# EAGLE board Iridium Carrier (2) (EAGLE 9.5.1)
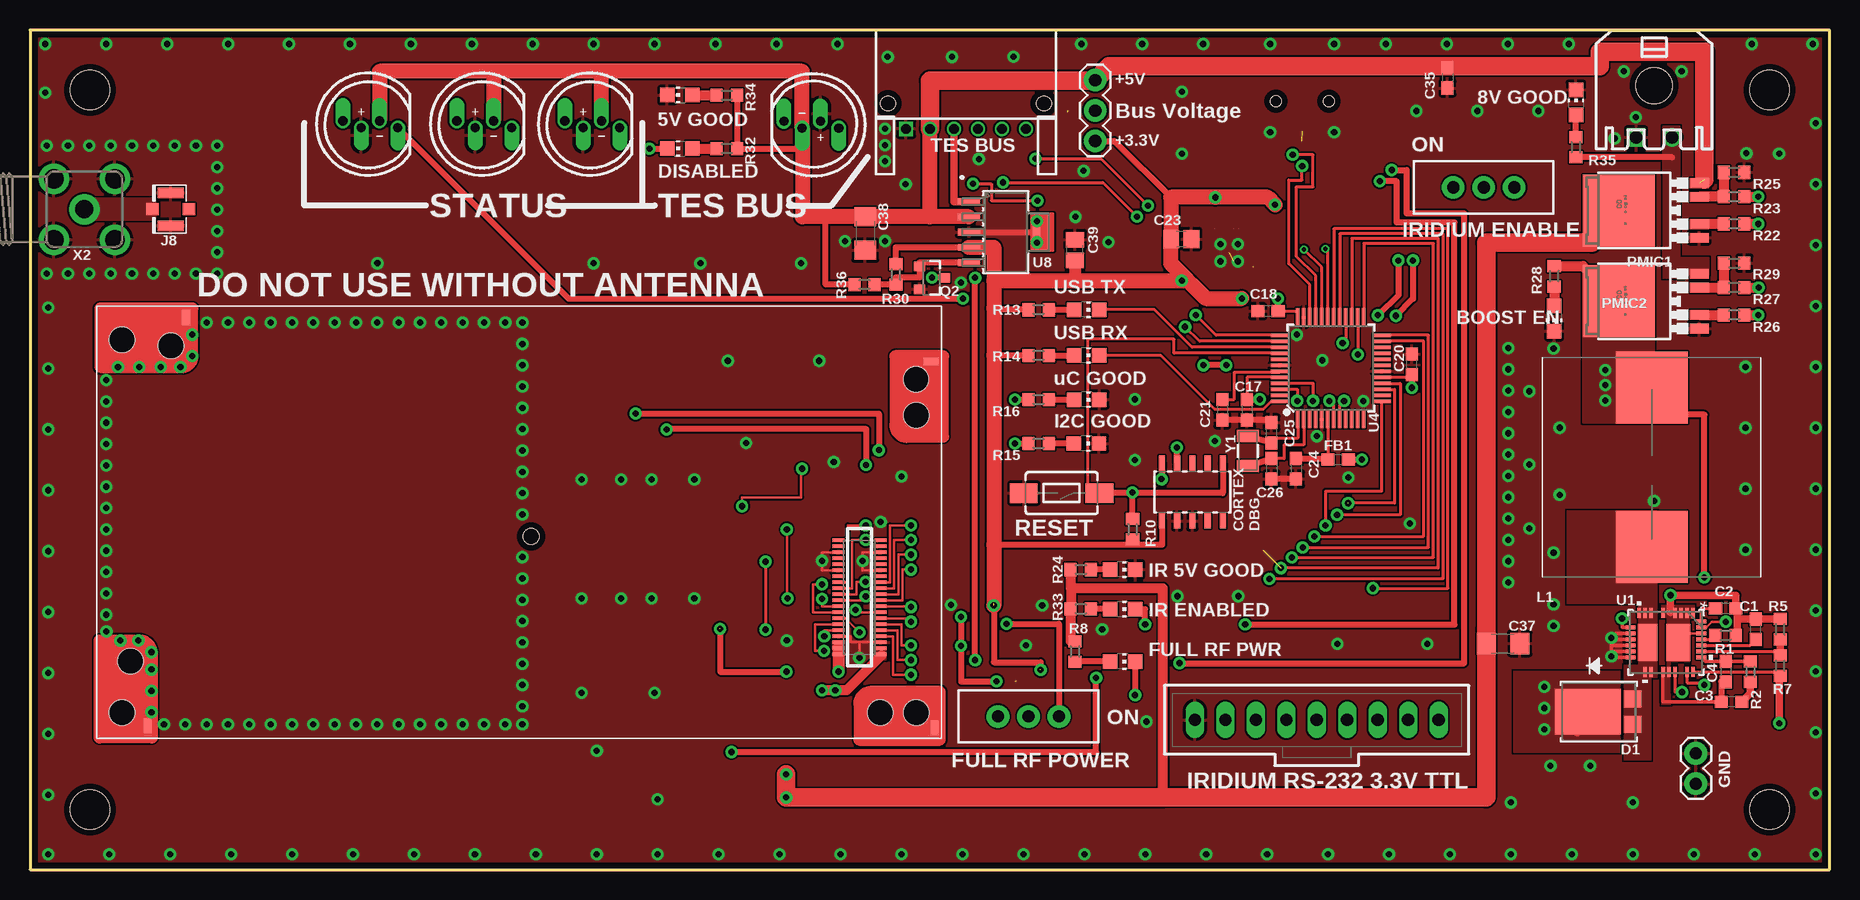
[diagram p0: board, top side]
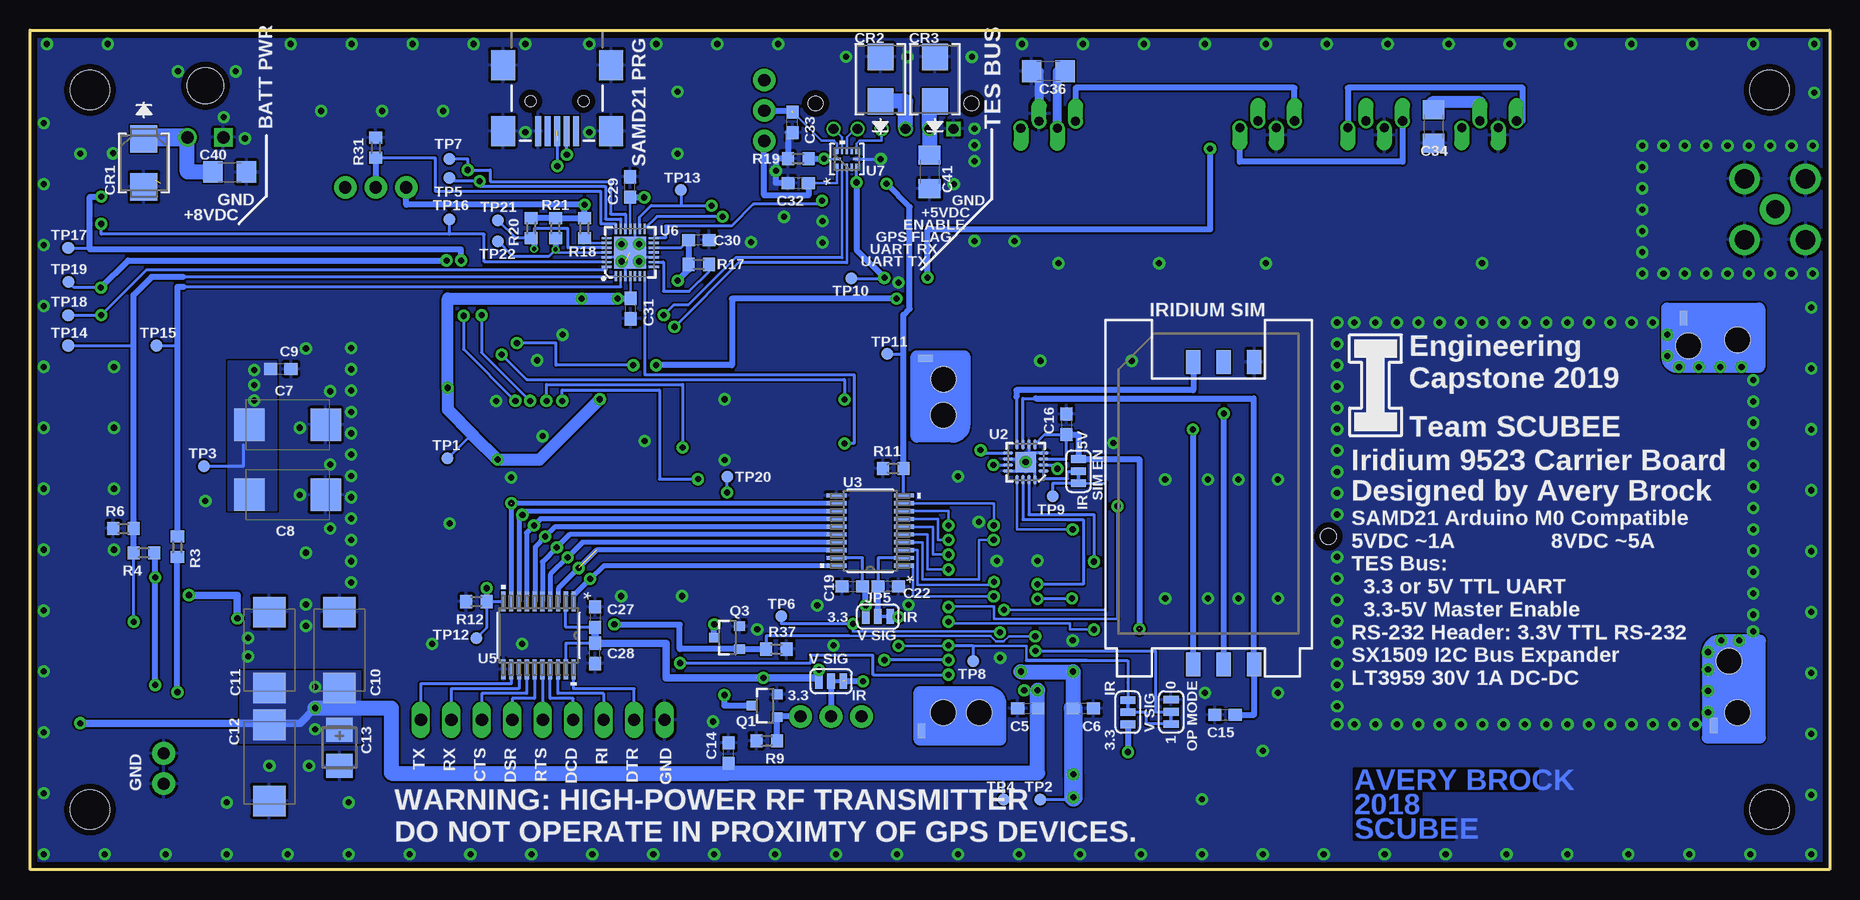
[diagram p1: board, bottom side, seen from below]

Size 150 x 70 mm. Coordinates in mm from the lower left corner, seen from the top.
Outline: 0,0 150,0 150,70 0,70 0,0
Copper layers (1*16): Top 0.035mm / dielectric 1.6mm / Bottom 0.035mm
Design rules "Elecrow_2-layer_PCB_eagle_rule": minimum track width 6mil, minimum drill 12mil, track to track 6mil, track to pad 6mil, pad to pad 6mil, via to via 8mil, smd to smd 0mil, copper to edge 20mil, drill to drill 10mil, minimum pad ring 6mil, minimum via ring 6mil, stop-mask expansion 0mil, vias tented up to drill 100mil, thermal gap 10mil
Net classes: 1 30V: clearance 0.254 mm to class 0

## Footprints (pad centres in the part's own frame; a part is rotated, then mirrored left to right if it is on the bottom)
C0603 = smd 1.1 x 1: 1 -0.85,0; 2 0.85,0
D/7343-31R = smd 2.55 x 2.7: + 3.175,0; - -3.175,0
CT3528 = smd 2 x 2.2: + -1.5,0; - 1.5,0
C0805 = smd 1.3 x 1.5: 1 -0.85,0; 2 0.85,0
C1206 = smd 1.6 x 1.8: 1 -1.4,0; 2 1.4,0
SMB = smd 2.311 x 2.261: 1 -1.994,0; 2 1.994,0
DIODE_DO214AA = smd 2.184 x 2.184: 1 -1.854,0; 2 1.854,0
DIODE_TO-277A = smd 1.397 x 1.473: 1 1.067,-2.794; 2 -1.067,-2.794 | smd 3.759 x 5.512: 3 0,0.927
0603 = smd 1.1 x 1: 1 -0.85,0; 2 0.85,0
IRIDIUM-9523 = smd 0.3 x 1: 1 -4.75,1.75; 2 -4.75,-1.75; 3 -4.25,1.75; 4 -4.25,-1.75; 5 -3.75,1.75; 6 -3.75,-1.75; 7 -3.25,1.75; 8 -3.25,-1.75; 9 -2.75,1.75; 10 -2.75,-1.75; 11 -2.25,1.75; 12 -2.25,-1.75; 13 -1.75,1.75; 14 -1.75,-1.75; 15 -1.25,1.75; 16 -1.25,-1.75; 17 -0.75,1.75; 18 -0.75,-1.75; 19 -0.25,1.75; 20 -0.25,-1.75; 21 0.25,1.75; 22 0.25,-1.75; 23 0.75,1.75; 24 0.75,-1.75; 25 1.25,1.75; 26 1.25,-1.75; 27 1.75,1.75; 28 1.75,-1.75; 29 2.25,1.75; 30 2.25,-1.75; 31 2.75,1.75; 32 2.75,-1.75; 33 3.25,1.75; 34 3.25,-1.75; 35 3.75,1.75; 36 3.75,-1.75; 37 4.25,1.75; 38 4.25,-1.75; 39 4.75,1.75; 40 4.75,-1.75 | smd 1.27 x 0.635: C$1 10.889,6.294; C$5 -23.317,-56.109; C$7 10.719,-59.284 | smd 1.27 x 0.635 bottom: C$2 11.123,6.551; C$6 -23.292,-56.972; C$8 10.693,-59.487 | smd 0.635 x 1.27 bottom: C$3 -19.936,6.22 | smd 0.635 x 1.27: C$4 -19.68,5.987 | hole 2.08: -18.18,4.73; -18.18,4.73 | hole 2.1: 9.62,1.73; -20.98,-57.37; 5.32,-60.77; -15.18,4.73; 9.62,4.73; -21.48,-61.47; 9.62,-61.47; 9.62,1.73; -20.98,-57.37; 5.32,-60.77; -15.18,4.73; 9.62,4.73; -21.48,-61.47 | hole 1.3: -5.08,-27.37
SIMHOLDER = smd 2 x 1.2: C1 -12.61,-3.81; C2 -12.61,-1.27; C3 -12.61,1.27; C5 12.61,-3.81; C6 12.61,-1.27; C7 12.61,1.27
1X03 = drill 1.016 pad 1.88: 1 0,0; 2 2.54,0; 3 5.08,0
SAMTECH_FTSH-105-01 = smd 0.508 x 1.27: 1 -2.54,-2.413; 2 -2.54,2.413; 3 -1.27,-2.413; 4 -1.27,2.413; 5 0,-2.413; 6 0,2.413; 7 1.27,-2.413; 8 1.27,2.413; 9 2.54,-2.413; 10 2.54,2.413
USB-MINIB = smd 2.5 x 0.5: D+ 2.5,0; D- 2.5,0.8; GND 2.5,-1.6; ID 2.5,-0.8; VBUS 2.5,1.6 | smd 2.5 x 2: S1 -3,4.5; S2 2.5,4.5; S3 -3,-4.5; S4 2.5,-4.5 | hole 0.9: 0,2.2; 0,-2.2
1X02 = drill 1.016 pad 1.88: 1 0,0; 2 2.54,0
1X6-JST-PA = drill 0.8 square: 1 0,0 | drill 0.8: 2 2,0; 3 4,0; 4 6,0; 5 8,0; 6 10,0 | hole 1.2: 11.5,2.1; -1.5,2.1
U.FL = smd 2.2 x 0.85: 1 0,1.375; 2 0,-1.375 | smd 1.05 x 1: FEED 1.525,0; NC -1.525,0
SMT-JUMPER_3_1-NC_TRACE_SILK = smd 0.635 x 1.27: 1 -1.016,0; 2 0,0; 3 1.016,0
WE-HCI_1890 = smd 6 x 6: 1 -6.65,0; 2 6.65,0
CHIP-LED0805 = smd 1.2 x 1.2: A 0,-1.05; C 0,1.05
WS2812B-PTH-KIT = drill 0.762 pad 1.27 offset: 1 2.413,0.079; 2 0.889,0.651; 3 -0.635,0.079; 4 -2.159,0.651
TO252-5-11 = smd 0.8 x 1.6: 1 -2.28,-5.41; 2 -1.14,-5.41; 4 1.14,-5.41; 5 2.28,-5.41 | smd 6 x 6: TAB 0,1.3
SOT23-3 = smd 0.8 x 0.9: 1 -0.95,-1; 2 0.95,-1; 3 0,1.1
R0603 = smd 1 x 1.1: 1 -0.85,0; 2 0.85,0
SWITCH_SPDT_PTH_11.6X4.0MM = drill 1.016 pad 1.88: 1 0,2.54; 2 0,0; 3 0,-2.54
TACTILE_SWITCH_SMD_6.0X3.5MM = smd 2.3 x 1.6: 1 -3.15,0; 2 3.15,0
PAD.03X.04 = smd 1.016 x 1.016: P$1 0,0
QFN-36_UHEMA = smd 0.813 x 0.305: 1 -2.451,2.25; 2 -2.451,1.75; 3 -2.451,1.25; 4 -2.451,0.75; 6 -2.451,-0.25; 8 -2.451,-1.25; 9 -2.451,-1.75; 10 -2.451,-2.25; 20 2.451,-1.75; 21 2.451,-1.25; 23 2.451,-0.25; 24 2.451,0.25; 25 2.451,0.75; 27 2.451,1.75; 28 2.451,2.25 | smd 0.305 x 0.813: 12 -1.25,-2.946; 13 -0.75,-2.946; 14 -0.25,-2.946; 15 0.25,-2.946; 16 0.75,-2.946; 17 1.25,-2.946; 30 1.25,2.946; 31 0.75,2.946; 32 0.25,2.946; 33 -0.25,2.946; 34 -0.75,2.946; 35 -1.25,2.946; 36 -1.75,2.946 | smd 3.099 x 1.981: 37 0,1.02 | smd 3.099 x 1.626: 38 0,-1.52
DAVID-HANDY_QFN16-3X3MM = smd 0.85 x 0.28: 1 -1.475,0.75; 2 -1.475,0.25; 3 -1.475,-0.25; 4 -1.475,-0.75; 9 1.475,-0.75; 10 1.475,-0.25; 11 1.475,0.25; 12 1.475,0.75 | smd 0.28 x 0.85: 5 -0.75,-1.475; 6 -0.25,-1.475; 7 0.25,-1.475; 8 0.75,-1.475; 13 0.75,1.475; 14 0.25,1.475; 15 -0.25,1.475; 16 -0.75,1.475 | smd 1.7 x 1.7: EXT 0,0
PW20 = smd 1.676 x 0.356: 1 -2.819,2.925; 2 -2.819,2.275; 3 -2.819,1.625; 4 -2.819,0.975; 5 -2.819,0.325; 6 -2.819,-0.325; 7 -2.819,-0.975; 8 -2.819,-1.625; 9 -2.819,-2.275; 10 -2.819,-2.925; 11 2.819,-2.925; 12 2.819,-2.275; 13 2.819,-1.625; 14 2.819,-0.975; 15 2.819,-0.325; 16 2.819,0.325; 17 2.819,0.975; 18 2.819,1.625; 19 2.819,2.275; 20 2.819,2.925
TQFP-48 = smd 1.5 x 0.28: 1 -4.25,2.75; 2 -4.25,2.25; 3 -4.25,1.75; 4 -4.25,1.25; 5 -4.25,0.75; 6 -4.25,0.25; 7 -4.25,-0.25; 8 -4.25,-0.75; 9 -4.25,-1.25; 10 -4.25,-1.75; 11 -4.25,-2.25; 12 -4.25,-2.75; 25 4.25,-2.75; 26 4.25,-2.25; 27 4.25,-1.75; 28 4.25,-1.25; 29 4.25,-0.75; 30 4.25,-0.25; 31 4.25,0.25; 32 4.25,0.75; 33 4.25,1.25; 34 4.25,1.75; 35 4.25,2.25; 36 4.25,2.75 | smd 0.28 x 1.5: 13 -2.75,-4.25; 14 -2.25,-4.25; 15 -1.75,-4.25; 16 -1.25,-4.25; 17 -0.75,-4.25; 18 -0.25,-4.25; 19 0.25,-4.25; 20 0.75,-4.25; 21 1.25,-4.25; 22 1.75,-4.25; 23 2.25,-4.25; 24 2.75,-4.25; 37 2.75,4.25; 38 2.25,4.25; 39 1.75,4.25; 40 1.25,4.25; 41 0.75,4.25; 42 0.25,4.25; 43 -0.25,4.25; 44 -0.75,4.25; 45 -1.25,4.25; 46 -1.75,4.25; 47 -2.25,4.25; 48 -2.75,4.25
QFN-28 = smd 0.85 x 0.2: 1 -1.975,1.2; 2 -1.975,0.8; 3 -1.975,0.4; 4 -1.975,0; 5 -1.975,-0.4; 6 -1.975,-0.8; 7 -1.975,-1.2; 15 1.975,-1.2; 16 1.975,-0.8; 17 1.975,-0.4; 18 1.975,0; 19 1.975,0.4; 20 1.975,0.8; 21 1.975,1.2 | smd 0.2 x 0.85: 8 -1.2,-1.975; 9 -0.8,-1.975; 10 -0.4,-1.975; 11 0,-1.975; 12 0.4,-1.975; 13 0.8,-1.975; 14 1.2,-1.975; 22 1.2,1.975; 23 0.8,1.975; 24 0.4,1.975; 25 0,1.975; 26 -0.4,1.975; 27 -0.8,1.975; 28 -1.2,1.975 | smd 2.65 x 2.65: 29 0,0
RUT12 = smd 0.6 x 0.2: 1 -0.7,0.8; 2 -0.7,0.4; 3 -0.7,0; 4 -0.7,-0.4; 5 -0.7,-0.8; 7 0.7,-0.8; 8 0.7,-0.4; 9 0.7,0; 10 0.7,0.4; 11 0.7,0.8 | smd 0.2 x 0.6: 6 0,-0.8; 12 0,0.8
SOT-223_5MC = smd 0.559 x 1.854: 1 -2.54,-3.058; 2 -1.27,-3.058; 3 0,-3.058; 4 1.27,-3.058; 5 2.54,-3.058 | smd 1.27 x 0.635: P$1 0,2.54
STAND-OFF = hole 3.302: 0,0
43650-0200 = drill 1.02 square: P$1 1.5,4.32 | drill 1.02: P$2 -1.5,4.32 | hole 3: 0,0
SMA90_DIP = drill 1.5 pad 2.54: ANTENNA 0,0 | drill 1.6 pad 2.54: GND1 -2.54,2.54; GND2 2.54,2.54; GND3 -2.54,-2.54; GND4 2.54,-2.54
70543-09 = drill 1.016 long: 1 -10.16,0; 2 -7.62,0; 3 -5.08,0; 4 -2.54,0; 5 0,0; 6 2.54,0; 7 5.08,0; 8 7.62,0; 9 10.16,0
CRYSTAL-SMD-3.2X1.5MM = smd 1 x 1.8: P$1 -1.25,0; P$2 1.25,0

## Placement (x,y rotation side)
C1  0.1uF  [C0603]  143.86,20.03 90 top
C2  10uF  [C0603]  141.34,21.75 180 top
C3  22nF  [C0603]  141.83,13.98 180 top
C4  50pF  [C0603]  141.34,16.5 270 top
C5  0.1uF  [C0603]  66.82,13.42 0 bottom
C6  0.1uF  [C0603]  62.2,13.42 180 bottom
C7  4.7uF 75V KO-CAP  [D/7343-31R]  128.52,37.08 180 bottom
C8  4.7uF 75V KO-CAP  [D/7343-31R]  128.52,31.24 180 bottom
C9  1uF  [C0603]  129.09,41.74 0 bottom
C10  4.7uF 75V KO-CAP  [D/7343-31R]  124.21,18.29 270 bottom
C11  4.7uF 75V KO-CAP  [D/7343-31R]  130.05,18.29 270 bottom
C12  4.7uF 75V KO-CAP  [D/7343-31R]  130.05,8.89 90 bottom
C13  2.2uF 50V KO-CAP  [CT3528]  124.21,10.16 270 bottom
C14  1uF  [C0603]  91.76,9.71 90 bottom
C15  1uF  [C0603]  50.39,12.92 0 bottom
C16  0.1uF  [C0603]  63.62,37.12 270 bottom
C17  0.1uF  [C0603]  101.44,38.34 270 top
C18  0.1uF  [C0603]  103.19,46.55 180 top
C19  0.1uF  [C0603]  81.45,23.61 0 bottom
C20  0.1uF  [C0603]  115.18,42.13 90 top
C21  0.1uF  [C0603]  99.38,38.34 270 top
C22  0.1uF  [C0603]  78.45,23.61 180 bottom
C23  1uF  [C0805]  95.96,52.58 0 top
C24  0.1uF  [C0603]  105.53,33.41 270 top
C25  15pF  [C0603]  103.5,36.41 90 top
C26  15pF  [C0603]  103.5,33.41 270 top
C27  0.1uF  [C0603]  102.91,21.04 270 bottom
C28  0.1uF  [C0603]  102.91,18.02 90 bottom
C29  0.1uF  [C0603]  99.97,56.91 90 bottom
C30  0.1uF  [C0603]  94.25,52.49 180 bottom
C31  0.1uF  [C0603]  99.94,46.77 90 bottom
C32  0.1uF  [C0603]  85.97,57.24 0 bottom
C33  0.1uF  [C0603]  86.45,62.29 90 bottom
C34  10uF  [C1206]  33.01,61.96 270 bottom
C35  0.1uF  [C0603]  118.16,66.01 270 top
C36  10uF  [C1206]  65.11,66.56 180 bottom
C37  4.7uF  [C1206]  122.78,18.85 0 top
C38  4.7uF  [C1206]  69.62,53.04 270 top
C39  1uF  [C0805]  87.11,51.66 90 top
C40  10uF  [C1206]  133.36,58.15 0 bottom
C41  10uF  [C1206]  75.02,58.17 270 bottom
CR1  SMBJ12A  [SMB]  140.51,58.91 270 bottom
CR2  SMBJ5.0A  [DIODE_DO214AA]  79.11,65.9 90 bottom
CR3  SMBJ5.0A  [DIODE_DO214AA]  74.57,65.9 90 bottom
D1  V10P10-MS/86A  [DIODE_TO-277A]  130.78,13.17 90 top
FB1  30Ω/1.8A  [0603]  109.04,34.18 0 top
J1  Molex 0541020404  [IRIDIUM-9523]  69.13,22.69 270 top
J2  SIM Holder  [SIMHOLDER]  51.76,29.7 90 bottom
J3  455-1750-1-ND  [1X03]  88.79,60.74 90 top
J4  CORTEX_DEBUG_SMD  [SAMTECH_FTSH-105-01]  96.89,31.48 0 top
J5  USB_MINI-B_SMT  [USB-MINIB]  106.06,64.07 270 bottom
J6  GND  [1X02]  138.86,7.15 90 top
J7  JST-PA-06-RT  [1X6-JST-PA]  73.02,61.76 0 top
J8  U.FL  [U.FL]  11.73,55.04 180 top
JP1  OP MODE  [SMT-JUMPER_3_1-NC_TRACE_SILK]  54.88,13.14 270 bottom
JP2  Sense V  [SMT-JUMPER_3_1-NC_TRACE_SILK]  58.49,13.12 90 bottom
JP3  Sense V  [SMT-JUMPER_3_1-NC_TRACE_SILK]  83.23,15.71 0 bottom
JP4  SIM_STOP  [SMT-JUMPER_3_1-NC_TRACE_SILK]  62.6,33.21 270 bottom
JP5  BUS_V  [SMT-JUMPER_3_1-NC_TRACE_SILK]  79.32,21.09 0 bottom
L1  47uH  [WE-HCI_1890]  135.17,33.54 270 top
LED1  RED  [CHIP-LED0805]  91.08,17.34 270 top
LED2  BLUE  [CHIP-LED0805]  88.06,35.52 270 top
LED3  BLUE  [CHIP-LED0805]  88.08,39.18 270 top
LED4  ORANGE  [CHIP-LED0805]  88.08,46.67 270 top
LED5  ORANGE  [CHIP-LED0805]  88.08,42.86 270 top
LED6  GREEN  [CHIP-LED0805]  91.08,25.01 270 top
LED7  WS2812B-PTH  [WS2812B-PTH-KIT]  28.5,62.5 180 top
LED8  WS2812B-PTH  [WS2812B-PTH-KIT]  38,62.5 180 top
LED9  WS2812B-PTH  [WS2812B-PTH-KIT]  47,62.5 180 top
LED10  WS2812B-PTH  [WS2812B-PTH-KIT]  65,61.74 0 top
LED11  GREEN  [CHIP-LED0805]  127.04,45.94 180 top
LED12  RED  [CHIP-LED0805]  54.17,60.11 90 top
LED13  GREEN  [CHIP-LED0805]  91.08,21.7 270 top
LED14  GREEN  [CHIP-LED0805]  54.17,64.58 90 top
LED15  GREEN  [CHIP-LED0805]  128.87,63.96 0 top
PMIC1  BTS50060  [TO252-5-11]  133.72,54.95 90 top
PMIC2  BTS50060  [TO252-5-11]  133.72,47.38 90 top
Q1  2N7002  [SOT23-3]  88.72,13.65 90 bottom
Q2  2N7002  [SOT23-3]  75.15,49.34 270 top
Q3  2N7002  [SOT23-3]  91.87,19.34 90 bottom
R1  10k  [R0603]  141.34,19.52 180 top
R2  3.3k  [R0603]  143.4,16.5 90 top
R3  20k  [R0603]  137.71,26.91 270 bottom
R4  20k  [R0603]  140.51,26.4 180 bottom
R5  3.3k  [R0603]  145.89,20.03 270 top
R6  10k  [R0603]  142.21,28.43 0 bottom
R7  59k  [R0603]  145.89,17 90 top
R8  470  [R0603]  87.12,18.17 270 top
R9  100k  [R0603]  88.59,10.73 180 bottom
R10  10k  [R0603]  91.91,28.37 90 top
R11  10k  [R0603]  78.05,33.44 180 bottom
R12  10k  [R0603]  112.79,22.34 180 bottom
R13  330  [R0603]  84.07,46.67 180 top
R14  330  [R0603]  84.07,42.86 180 top
R15  330  [R0603]  84.07,35.52 180 top
R16  330  [R0603]  84.07,39.18 180 top
R17  10k  [R0603]  94.25,50.46 0 bottom
R18  10k  [R0603]  103.78,53.48 270 bottom
R19  10k  [R0603]  85.97,59.27 180 bottom
R20  10k  [R0603]  108.22,53.48 270 bottom
R21  10k  [R0603]  106.19,53.48 270 bottom
R22  10k  [R0603]  142.06,53.83 180 top
R23  10k  [R0603]  142.06,56.1 180 top
R24  470  [R0603]  87.6,25.01 180 top
R25  1k  [R0603]  142.06,58.13 0 top
R26  10k  [R0603]  142.06,46.24 180 top
R27  10k  [R0603]  142.06,48.53 180 top
R28  1k  [R0603]  127.04,49.47 90 top
R29  1k  [R0603]  142.06,50.56 0 top
R30  100k  [R0603]  72.18,49.62 90 top
R31  10k  [R0603]  121.18,60.18 90 bottom
R32  470  [R0603]  58.08,60.11 180 top
R33  470  [R0603]  87.6,21.73 0 top
R34  470  [R0603]  58.08,64.55 0 top
R35  1k  [R0603]  128.87,60.23 270 top
R36  100k  [R0603]  69.56,48.78 180 top
R37  100k  [R0603]  87.78,18.38 0 bottom
S1  FULL RF PWR  [SWITCH_SPDT_PTH_11.6X4.0MM]  83.23,12.76 270 top
S2  RST BTN  [TACTILE_SWITCH_SMD_6.0X3.5MM]  86,31.38 180 top
S3  PWR SW  [SWITCH_SPDT_PTH_11.6X4.0MM]  121.18,56.88 270 top
TP1  TEST-POINT3X4  [PAD.03X.04]  115.19,34.29 0 bottom
TP2  TEST-POINT3X4  [PAD.03X.04]  65.79,5.84 0 bottom
TP3  TEST-POINT3X4  [PAD.03X.04]  135.51,33.63 0 bottom
TP4  TEST-POINT3X4  [PAD.03X.04]  68.83,5.84 0 bottom
TP5  TEST-POINT3X4  [PAD.03X.04]  115.05,57.68 0 bottom
TP6  TEST-POINT3X4  [PAD.03X.04]  87.36,21.13 0 bottom
TP7  TEST-POINT3X4  [PAD.03X.04]  115.05,59.26 0 bottom
TP8  TEST-POINT3X4  [PAD.03X.04]  71.36,17.39 0 bottom
TP9  TEST-POINT3X4  [PAD.03X.04]  64.76,31.13 0 bottom
TP10  TEST-POINT3X4  [PAD.03X.04]  81.53,49.28 0 bottom
TP11  TEST-POINT3X4  [PAD.03X.04]  78.52,42.98 0 bottom
TP12  TEST-POINT3X4  [PAD.03X.04]  112.78,19.3 0 bottom
TP13  TEST-POINT3X4  [PAD.03X.04]  95.74,56.66 0 bottom
TP14  TEST-POINT3X4  [PAD.03X.04]  146.81,43.69 0 bottom
TP15  TEST-POINT3X4  [PAD.03X.04]  139.45,43.69 0 bottom
TP16  TEST-POINT3X4  [PAD.03X.04]  115.05,54.22 0 bottom
TP17  TEST-POINT3X4  [PAD.03X.04]  146.81,51.82 0 bottom
TP18  TEST-POINT3X4  [PAD.03X.04]  146.81,46.23 0 bottom
TP19  TEST-POINT3X4  [PAD.03X.04]  146.8,48.98 0 bottom
TP20  TEST-POINT3X4  [PAD.03X.04]  91.88,32.76 0 bottom
TP21  TEST-POINT3X4  [PAD.03X.04]  110.98,54.12 0 bottom
TP22  TEST-POINT3X4  [PAD.03X.04]  110.98,52.38 0 bottom
U1  LT3959  [QFN-36_UHEMA]  136.37,18.94 270 top
U2  DAVID-HANDY_ON_NCN4555DEFAULT  [DAVID-HANDY_QFN16-3X3MM]  67,33.97 180 bottom
U3  TXB0108PWR  [PW20]  79.95,28.26 180 bottom
U4  ATSAMD21G-A  [TQFP-48]  108.43,41.8 90 top
U5  TXB0108PWR  [PW20]  107.61,19.52 270 bottom
U6  SX1509  [QFN-28]  99.97,51.45 90 bottom
U7  TXB0104RUTR  [RUT12]  81.91,59.24 90 bottom
U8  MCP1826T-3302E/DC  [SOT-223_5MC]  81.32,53.15 270 top
U$3  [STAND-OFF]  145,65 0 top
U$6  [STAND-OFF]  5,65 0 top
U$7  [STAND-OFF]  5,5 0 top
U$8  [STAND-OFF]  145,5 0 top
X1  43650-0200  [43650-0200]  135.38,65.37 180 top
X2  [SMA90_DIP]  4.54,55.04 90 top
X3  C-GRID-09-70543  [70543-09]  107.26,12.48 0 top
Y1  32.768kHz  [CRYSTAL-SMD-3.2X1.5MM]  101.52,34.91 90 top

## Library data of the parts
C1-C22 C24-C33 C35 = rcl; SPICEPREFIX: C
C23 C34 C36-C41 LED1-LED6 LED11-LED15 R1-R37 X2 = adafruit
CR1 = SMBJ12A; MANUFACTURER_PART_NUMBER: SMBJ12A; VENDOR: AVX Corporation
CR2 CR3 = SMBJ5 TVS; MANUFACTURER_PART_NUMBER: SMBJ5.0A; VENDOR: AVX Corporation
D1 = V10P10
FB1 = SparkFun-Coils; PROD_ID: NDUC-13805
J1 = Iridium-9523
J2 = SparkFun-Connectors; PROD_ID: CONN-08536; SF_ID: PRT-00548
J3 = SparkFun-Connectors; PROD_ID: XXX-00000
J4 J6 J7 TP1-TP22 = SparkFun-Connectors
J5 = SparkFun-Connectors; PROD_ID: CONN-08193; SF_ID: PRT-00587
J8 = SparkFun-Connectors; PROD_ID: CONN-09193; SF_ID: WRL-09144
JP1-JP5 = SparkFun-Jumpers
L1 = Wurth_Elektronik_Passive_rev16c
LED7-LED10 = SparkFun-LED
PMIC1 PMIC2 = infineon
Q1-Q3 = SparkFun-DiscreteSemi; PROD_ID: TRANS-12988; VALUE: 5.8A/30V/35mΩ
S1 S3 = SparkFun-Switches; PROD_ID: SWCH-08261; SF_SKU: COM-00102
S2 = SparkFun-Switches; PROD_ID: SWCH-00815; SF_SKU: COM-08229
U1 = LT3959QFN
U2 = NCN4555; SPICEPREFIX: X
U3 U5 = TXB0108-PWR; MANUFACTURER_PART_NUMBER: TXB0108PWR; VENDOR: Texas Instruments
U4 = SparkFun-IC-Microcontroller; PROD_ID: IC-13064
U6 = SparkFun-IC-Special-Function; PROD_ID: IC-11311
U7 = TXB0104; MANUFACTURER_PART_NUMBER: TXB0104RUTR; VENDOR: Texas Instruments
U8 = MCP1826; MANUFACTURER_PART_NUMBER: MCP1826T3302EDC; VENDOR: Microchip
U$3 U$6-U$8 = SparkFun-Hardware
X1 = con-molex-micro-fit-3_0
X3 = con-molex; OC_FARNELL: unknown; OC_NEWARK: unknown; SPICEPREFIX: X
Y1 = SparkFun-Clocks; PROD_ID: XTAL-13062

## Nets
3.3V: C17.1 C18.1 C19.2 C20.1 C23.1 C27.2 C28.2 C29.1 C30.2 C31.2 C32.2 C39.1 FB1.2 J3.1 J4.1 JP2.1 JP3.1 JP5.1 R10.1 R13.2 R14.2 R17.1 R18.1 R20.1 R21.1 R30.2 S3.3 TP1.P$1 U3.19 U4.17 U4.36 U4.44 U5.2 U5.19 U6.4 U6.12 U6.18 U7.1 U8.4
3.3V_GOOD: Q2.1 R30.1 R36.1 U8.5
3.3V_SENSE: J1.29 JP2.3 JP3.3 JP5.3 TP8.P$1
5V_EN: R22.1 TP16.P$1 U6.27
5V_ISENSE: R23.1 TP17.P$1 U4.7
8V_EN: R26.1 TP18.P$1 U6.28
8V_ISENSE: R27.1 TP19.P$1 U4.8
3959_EN: R3.1 TP15.P$1 U6.2
3959_GOOD: R4.2 R6.2 TP14.P$1 U1.35 U6.1
!RST: J4.10 R10.2 S2.1 TP20.P$1 U4.40
+5V: C34.1 C35.1 C36.1 C38.1 C41.1 CR3.1 J3.3 J7.2 LED7.3 LED8.3 LED9.3 LED10.3 PMIC1.5 R32.1 R34.2 R36.2 U8.2
AGND: C1.2 C2.1 C3.2 C4.2 R1.1 R5.1 U1.1 U1.2 U1.3 U1.4 U1.6 U1.12 U1.23 U1.24 U1.34 U1.37
BOOST_EN: J1.33 TP7.P$1 U6.19
CTS: J1.17 U3.7
DCD: J1.18 U3.4
DSR: J1.19 U3.6
DTR: J1.22 U3.1
EN_IR_BUS: R11.1 TP11.P$1 U3.10 U6.14
EN_RS232_BUS: R12.1 TP12.P$1 U4.30 U5.10
EN_TES_BUS: R19.1 TP13.P$1 U6.16 U7.12
GND: C5.1 C6.1 C7.- C8.- C9.2 C10.- C11.- C12.- C13.- C14.2 C15.1 C16.1 C17.2 C18.2 C19.1 C20.2 C21.2 C22.1 C23.2 C24.2 C25.2 C26.2 C27.1 C28.1 C29.2 C30.1 C31.1 C32.1 C33.1 C34.2 C35.2 C36.2 C37.2 C38.2 C39.2 C40.2 C41.2 CR1.2 CR2.2 CR3.2 J1.5 J1.6 J1.11 J1.12 J1.34 J1.35 J1.C$1 J1.C$2 J1.C$3 J1.C$4 J1.C$5 J1.C$6 J1.C$7 J1.C$8 J2.C5 J4.3 J4.5 J5.GND J5.S1 J5.S2 J5.S3 J5.S4 J6.1 J6.2 J7.1 J8.1 J8.2 JP1.1 LED2.C LED3.C LED6.C LED7.2 LED8.2 LED9.2 LED10.2 LED11.C LED14.C LED15.C PMIC1.1 PMIC2.1 Q1.2 Q2.2 Q3.2 R6.1 R9.2 R11.2 R12.2 R19.2 R25.2 R29.2 R31.2 R37.2 S2.2 U1.13 U1.14 U1.15 U1.16 U1.17 U2.4 U2.6 U2.10 U2.12 U2.16 U2.EXT U3.11 U4.5 U4.18 U4.35 U4.42 U5.11 U6.3 U6.10 U6.17 U6.26 U6.29 U7.6 U8.3 U8.P$1 X1.P$1 X2.GND1 X2.GND2 X2.GND3 X2.GND4 X3.1
I2C_LED: R15.2 U6.7
IO-CTS: U3.14 U4.13 U5.7
IO-DCD: U3.17 U4.25 U5.4
IO-DSR: U3.15 U4.23 U5.6
IO-DTR: U3.20 U4.29 U5.1
IO-RI: U3.18 U4.27 U5.3
IO-RTS: U3.16 U4.24 U5.5
IO-RX: U3.13 U4.16 U5.8
IO-TX: U3.12 U4.15 U5.9
IR_BOOST: C7.+ C8.+ C9.1 L1.1 PMIC2.TAB R4.1 R28.2 TP3.P$1 U1.27
IR_SIM_CLK: J1.24 U2.13
IR_SIM_EN: J1.25 JP4.3 TP9.P$1
IR_SIM_IO: J1.27 U2.15
IR_SIM_RST: J1.26 U2.14
IR_SIM_V: J1.23 U2.2
MODE_SW: J1.30 JP1.2
N$1: JP4.2 U2.1
N$2: D1.1 D1.2 L1.2 U1.8 U1.9 U1.10 U1.20 U1.21 U1.38
N$3: C2.2 U1.36
N$4: JP1.3 JP2.2
N$5: C1.1 U1.32
N$6: R1.2 U1.33
N$7: LED1.C Q1.3
N$8: C4.1 R2.2 U1.30
N$9: C3.1 R2.1
N$10: R5.2 R7.2 U1.31
N$11: JP3.2 S1.2
N$13: LED1.A R8.2
N$14: C22.2 JP5.2 U3.2
N$15: C33.2 J3.2 U7.11
N$16: LED2.A R15.1
N$17: C24.1 FB1.1 U4.6
N$18: C21.1 U4.43
N$19: C25.1 U4.1 Y1.P$2
N$20: C26.1 U4.2 Y1.P$1
N$21: LED4.A R13.1
N$22: LED5.A R14.1
N$26: PMIC2.4 R27.2 R29.1
N$27: PMIC2.2 R26.2
N$28: LED7.1 LED8.4
N$29: LED8.1 LED9.4
N$30: PMIC1.4 R23.2 R25.1
N$31: PMIC1.2 R22.2
N$32: LED9.1 LED10.4
N$33: R3.2 U1.25
N$34: LED6.A R24.1
N$35: LED14.A R34.1
N$36: LED3.A R16.1
N$37: LED12.A R32.2
N$38: LED12.C Q2.3
N$39: LED15.A R35.1
N$40: LED11.A R28.1
N$41: LED13.A R33.2
N$42: LED13.C Q3.3
N$71: R17.2 U6.9
N$72: R18.2 U6.23
N$75: J8.FEED X2.ANTENNA
PIXELS: LED7.4 U4.28
PWR_EN: J1.32 Q3.1 R37.1 TP5.P$1 U6.20
PWR_SW: R31.1 S3.2 U6.21
RF_EN: J1.28 Q1.1 R9.1 S1.1 TP6.P$1
RI: J1.20 U3.3
RS232-CTS: U5.14 X3.7
RS232-DCD: U5.17 X3.4
RS232-DSR: U5.15 X3.6
RS232-DTR: U5.20 X3.2
RS232-RI: U5.18 X3.3
RS232-RTS: U5.16 X3.5
RS232-RX: U5.13 X3.8
RS232-TX: U5.12 X3.9
RTS: J1.21 U3.5
RX: J1.15 U3.8
RX_LED: LED5.C U4.48
SCL: R21.2 TP22.P$1 U4.32 U6.25
SDA: R20.2 TP21.P$1 U4.31 U6.24
SIM_CLK: J2.C3 U2.11
SIM_IO: J2.C7 U2.8
SIM_RST: J2.C2 U2.9
SIM_VCC: C15.2 J2.C1 U2.7
SWCLK: J4.4 U4.45
SWDIO: J4.2 U4.46
SYS-RX: U4.38 U7.3
SYS-TX: U4.37 U7.2
SYS_LED: R16.2 U4.26
SYS_SPARE: U7.4
TES-EN: CR2.1 J7.3 U8.1
TES-GPS-FLAG: J7.4 U7.7
TES-RX: J7.5 U7.9
TES-SPARE: U7.8
TES-TX: J7.6 U7.10
TX: J1.16 U3.9
TX_ACTIVE: J1.31 TP10.P$1 U6.15 U7.5
TX_LED: LED4.C U4.39
USB_D+: J5.D+ U4.34
USB_D-: J5.D- U4.33
V_BATT: C6.2 C16.2 C37.1 J1.36 J1.38 J1.40 JP4.1 PMIC1.TAB R8.1 R24.2 R33.1 TP2.P$1 U2.3 U2.5
VBAT: C40.1 CR1.1 PMIC2.5 R35.2 X1.P$2
VBUS: J5.VBUS
VCC [30V]: C5.2 C10.+ C11.+ C12.+ C13.+ C14.1 D1.3 J1.37 J1.39 R7.1 TP4.P$1 U1.28

## Tracks (layer width: path | path; a pad name or v marks a point on that pad's centre or on a via)
3.3V  (via drill 0.51 pad 1.02)  (2 unrouted)
  Top 0.254: U4.44 101.44,41.05 C17.1 | C18.1 105.68,46.55 U4.36 | U4.17 115.18,41.05 C20.1
  Top 0.508: v80.33,22.01 80.33,17.28 84.25,17.28 84.25,16.68 | v58.49,9.79 88.87,9.79 v88.87,15.99 | R30.2 72.18,51.88 U8.4 | 115.17,40.16 v115.18,40.17 C20.1 | C18.1 v104.03,47.61 | C17.1 v102.51,39.19 v102.51,39.2 | FB1.2 v111.02,34.17 | R13.2 80.33,46.67 80.33,46.77 | R14.2 80.33,42.86 80.33,42.89 | 80.33,28.23 80.33,27.06 91.95,27.06 | J4.1 94.35,27.06 91.95,27.06 | R10.1 91.95,27.52 91.95,27.06 | v96,49.11 96.03,49.09 96.54,49.09 | J3.1 90.39,60.74 95.09,56.05
  Top 1.016: 96.54,49.09 96.75,48.87 | C39.1 87.11,49.23 86.97,49.09
  Top 1.27: U8.4 80.33,51.88 80.33,49.09 | 80.33,49.09 80.33,46.77 80.33,42.89 80.33,27.06 v80.33,22.01 | 96.75,48.87 98.01,47.61 v101.01,47.61 | 80.33,49.09 86.97,49.09 96.54,49.09 95.09,50.53 95.09,52.58 | v103.78,55.44 103.17,56.05 v98.8,56.05 95.09,56.05 95.09,52.58 | 95.09,52.58 C23.1
  Bottom 0.203: U7.1 82.71,57.24 C32.2 | U6.18 C29.1 | U6.4 99.94,49.45 C31.2
  Bottom 0.254: C19.2 80.6,25.98 U3.19 | C27.2 105.34,20.19 U5.2 | C28.2 105.34,18.87 U5.19 | U6.12 95.74,51.85 C30.2 | TP1.P$1 113.24,36.24 113.08,36.24
  Bottom 0.508: C32.2 85.12,56.22 88.79,56.22 J3.1 | JP5.1 80.33,22.19 | v84.25,16.65 JP3.1 84.25,15.99 | JP2.1 v58.49,9.79 | v80.33,22.01 80.33,23.61 C19.2 | C29.1 99.95,56.05 v98.8,56.05 | v101.01,47.61 101,47.62 C31.2 | C30.2 R17.1 95.1,50.01 v96,49.11 | S3.3 118.64,55.44 v103.78,55.44 R18.1 R21.1 R20.1
  Bottom 0.61: 84.25,15.99 v88.87,15.99 96.97,15.99 96.97,18.87 C28.2 C27.2
  Bottom 1.016: v102.51,39.2 107.54,34.17 v111.02,34.17 113.08,36.24 115.18,38.34 v115.18,40.17 115.18,47.61 v104.03,47.61 v101.01,47.61
3.3V_GOOD
  Top 0.508: R36.1 72.17,48.78 R30.1 72.18,49.36 74.15,49.36 Q2.1 74.15,50.61 U8.5 77.6,50.61 77.58,50.63
3.3V_SENSE  (via drill 0.51 pad 1.02)  (2 unrouted)
  Top 0.203: J1.29 72.66,20.44 72.66,18.68 v73.42,18.68
  Top 0.508: 80.64,15.68 v80.56,15.68 77.62,15.68 v77.62,18.66 v77.62,21.07 77.62,21.14
  Bottom 0.203: 66.95,17.46 66.95,18.66 73.4,18.66 v73.42,18.68 73.48,18.63 77.62,18.63 | 66.95,17.46 66.95,17.44 | 66.95,17.46 61.94,17.46 | 58.49,15.58 58.49,15.38
  Bottom 0.254: 66.95,17.44 58.49,17.44 58.49,15.58 JP2.3 | TP8.P$1 71.36,18.63 73.48,18.63
  Bottom 0.508: v80.56,15.68 82.11,15.68 82.11,15.71 | v77.62,21.07 78.28,21.07 arc90 JP5.3
5V_EN  (via drill 0.51 pad 1.02)
  Top 0.813: R22.1 v144.06,53.84
  Bottom 0.254: U6.27 112.13,50.65 112.13,52.97 115.06,52.97 | 115.06,52.97 144.06,52.97 v144.06,53.84 | TP16.P$1 115.05,52.98 115.06,52.97
5V_ISENSE  (via drill 0.51 pad 1.02)
  Top 0.254: U4.7 108.68,38.73 v108.32,39.08
  Top 0.508: v114.06,50.79 114.06,47.92 v112.36,46.22
  Top 0.813: R23.1 v144.06,56.09
  Bottom 0.254: v112.36,46.22 112.36,43.12 v108.32,39.08 | TP17.P$1 145.12,51.82 145,51.7
  Bottom 0.508: v144.06,56.09 145,56.09 145,51.7 114.06,51.7 v114.06,50.79
8V_EN  (via drill 0.51 pad 1.02)  (1 unrouted)
  Top 0.813: R26.1 v144.06,46.24
  Bottom 0.254: 101.97,50.22 101.97,49.99 140.31,49.99 v144.06,46.24 144.07,46.23 TP18.P$1
8V_ISENSE  (via drill 0.51 pad 1.02)
  Top 0.254: U4.8 109.18,38.71 v109.54,39.08
  Top 0.508: v115.28,50.79 115.28,47.59 v113.86,46.16
  Top 0.813: R27.1 v144.09,48.53
  Bottom 0.254: v113.86,46.16 113.86,43.4 v109.54,39.08 | v144.09,48.53 146.34,48.53 TP19.P$1
  Bottom 0.508: v144.09,48.53 141.83,50.79 v115.28,50.79
3959_EN
  Bottom 0.203: U6.2 100.77,48.6
  Bottom 0.254: 137.2,48.6 100.77,48.6 | 137.71,48.52 137.71,48.6 | TP15.P$1 137.71,43.69
  Bottom 0.508: 137.71,48.52 137.71,43.69 R3.1 | 137.71,48.6 137.2,48.6
3959_GOOD  (via drill 0.51 pad 1.02)
  Top 0.203: 139.34,20.21 U1.35 139.32,20.18 139.72,20.18 140.21,20.66 v141.34,20.66
  Bottom 0.254: v141.34,20.66 141.34,26.4 R4.2 | R6.2 | 141.36,42.02 141.34,42.02 | U6.1 101.17,49.41 137.23,49.41 | TP14.P$1 141.36,43.69
  Bottom 0.508: R4.2 R6.2 | R6.2 141.36,42.02 141.36,43.69 141.36,47.92 139.86,49.41 137.23,49.41
!RST  (via drill 0.51 pad 1.02)
  Top 0.254: U4.40 95.36,43.05 95.36,44.22 88.15,44.22 88.15,31.38 S2.1 | v91.9,31.45 91.91,31.43 91.91,31.38
  Top 0.508: J4.10 99.43,31.38 91.91,31.38 | 91.91,31.38 S2.1 | R10.2 91.91,31.38
  Bottom 0.254: v91.9,31.45 91.9,32.74 TP20.P$1
+5V  (1 unrouted)
  Top 0.305: R32.1 | R34.2
  Top 0.508: R34.2 R32.1 64.29,60.11 64.38,60.2 | R36.2 66.32,48.78 66.32,54.44 | C35.1 118.49,66.86 118.49,66.97
  Top 1.27: 47.62,66.56 64.36,66.56 LED10.3 64.38,61.8 64.38,60.2 64.38,54.44 66.32,54.44 C38.1 69.71,54.42 75.02,54.42 | 47.62,66.56 47.62,62.44 LED9.3 | 47.62,66.56 38.63,66.56 | 38.63,66.56 LED8.3 | 38.63,66.56 29.14,66.56 LED7.3 | 75.02,54.42 J7.2 | U8.2 75.02,54.42
  Top 1.524: 139.57,57.52 139.57,68.19 130.85,68.19 130.85,66.97 118.49,66.97 89.94,66.97 J3.3 88.74,65.77 75.02,65.77 J7.2
  Bottom 0.508: C34.1 33.14,63.36 33.14,63.98
  Bottom 0.762: LED10.3 64.36,66.56 C36.1
  Bottom 1.016: LED7.3 29.14,63.98 33.14,63.98 33.14,63.44 | J7.2
  Bottom 1.27: CR3.1 arc-90 75.02,63.59 J7.2 C41.1
AGND  (via drill 0.51 pad 1.02)
  Top 0.203: U1.34 arc90 U1.34 137.91,19.7
  Top 0.305: U1.12 132.71,20.18 v132.71,20.94 | C3.2 136.12,13.98 U1.23
  Top 0.508: 136.8,21.39 136.75,21.44 | C4.2 140.98,15.65 C3.2
  Top 0.61: 136.75,21.44 v136.75,22.87 v136.75,22.86 142.19,22.86 C2.1 142.19,21.63 142.31,21.63 142.31,20.89 | R1.1 142.19,19.7 142.31,19.7 142.31,20.89 | R5.1 C1.2 142.31,20.89
  Bottom 0.61: v132.71,20.94 132.71,22.87 v136.75,22.87
  pour Top (isolate 0.254, no thermals): 135.99,22.03 135.99,21.02 136.42,21.02 136.42,16.85 135.99,16.85 135.99,13.75 136.77,13.75 136.77,17.36 138.37,17.36 138.37,20.94 138.78,20.94 138.78,22.03
BOOST_EN  (via drill 0.51 pad 1.02)  (1 unrouted)
  Top 0.203: J1.33 71.95,19.44 71.95,16.24 v73.42,16.24
  Top 0.508: v95.8,17.21 119.55,17.21 119.55,54.72 114.75,54.72 114.75,58.33 v113.51,58.33
  Bottom 0.254: v73.42,16.24 79.75,16.24 79.75,17.87 84.96,17.87 84.96,17.21 v95.8,17.21 | 100.36,53.42 100.36,54.65 101.61,54.65 101.61,57.37 111.63,57.37 111.63,58.33 v113.51,58.33 113.51,59.26 TP7.P$1
CTS  (via drill 0.51 pad 1.02)
  Top 0.203: v73.42,27.47 72.03,27.47 72.03,23.44 J1.17
  Bottom 0.203: v73.42,27.47 74.31,27.47 74.31,29.23 U3.7
  Bottom 0.508: v73.42,27.47 73.42,27.52
DCD  (via drill 0.51 pad 1.02)
  Top 0.203: J1.18 68.52,23.44 68.52,27.47 v69.67,27.47
  Bottom 0.203: v69.67,27.47 70.89,27.47 70.89,24.19 75.61,24.19 75.61,27.28 U3.4
DSR  (via drill 0.51 pad 1.02)
  Top 0.203: J1.19 72.38,22.94 72.38,26.25 v73.42,26.25
  Bottom 0.203: 73.45,26.23 v73.42,26.25 74.72,26.25 74.72,28.57 77.13,28.57 U3.6
DTR  (via drill 0.51 pad 1.02)
  Top 0.203: J1.22 69.67,22.44 v69.67,22.77
  Bottom 0.203: v69.67,22.77 76.4,22.77 76.4,25.33 U3.1
  Bottom 0.508: v69.67,22.77 69.69,22.8
EN_IR_BUS  (via drill 0.51 pad 1.02)
  Top 0.254: v78.61,57.17 80.13,57.17 80.13,55.79 v83.97,55.79 v83.97,55.78
  Bottom 0.254: 77.44,33.44 R11.1 77.2,31.18 U3.10 | TP11.P$1 77.24,42.98 77.2,43.03 | v83.98,55.78 v83.97,55.78 83.97,55.47 83.99,55.46 89.72,55.46 91.51,53.66 97.03,53.66 97.03,52.65 U6.14
  Bottom 0.508: R11.1 77.2,43.03 77.2,46.25 76.68,46.76 76.68,55.24 v78.61,57.17
EN_RS232_BUS  (via drill 0.51 pad 1.02)
  Top 0.254: v111.93,23.46 118.21,23.46 118.21,53.42 108.68,53.42 U4.30
  Bottom 0.254: U5.10 R12.1 111.94,20.14 TP12.P$1
  Bottom 0.508: v111.93,23.46 R12.1
EN_TES_BUS  (via drill 0.51 pad 1.02)
  Top 0.254: v83.81,59.27 89.27,59.27 v93.19,55.36
  Bottom 0.203: U7.12 85.12,59.24 R19.1
  Bottom 0.254: U6.16 99.17,54.41 98.22,55.36 95.73,55.36 | 95.73,55.36 v93.19,55.36 | TP13.P$1 95.74,55.37 95.73,55.36
  Bottom 0.508: R19.1 v83.81,59.27
GND  (via drill 0.51 pad 1.02)  (1 unrouted)
  Top 0.203: J1.5 69.41,26.44 v69.41,25.72 69.41,24.94 J1.11 | J1.6 66.03,26.44 v66.03,25.74 66.03,24.94 J1.12 | J1.34 68.4,19.44 68.4,18.96 69.13,18.96 | 69.13,18.96 v69.13,17.64 | J1.35 70.87,18.96 69.13,18.96
  Top 0.305: U1.13 132.21,19.68 v131.83,19.3 | U1.17 131.83,17.68 v131.83,17.78 131.83,18.18 | U1.16 131.83,18.18 | U1.15 131.83,18.68 | 131.83,18.68 131.83,18.18 | U1.14 131.83,19.18 131.83,18.68
  Top 0.508: U8.3 83.61,53.15 83.61,52.95 | C25.2 103.5,37.49 C17.2 C21.2 | C24.2 C26.2
  Bottom 0.203: U6.17 99.57,52.49 v99.23,52.16 | U6.10 98.89,51.05 v99.23,50.71 | U6.26 101.02,51.05 v100.68,50.71
  Bottom 0.254: U2.6 66.75,34.72 | 66.75,34.72 66.75,34.56 66.8,34.56 | U2.4 66.75,34.72 | U2.10 67,34.22 U2.EXT | U2.12 67,33.22 U2.EXT | U2.16 66.25,33.97 U2.EXT | U7.6 v79.09,59.24 | U6.3 100.37,50.71 v100.68,50.71
  Bottom 0.508: C33.1 86.82,61.44 R19.2 87.83,59.27 v87.83,58.25 87.83,57.24 C32.1
  Bottom 0.762: C36.2 65.89,66.56 LED10.2
  other vias: 67,33.97 67.94,52.39 71.27,61.76 71.27,59.07 83.94,54.06 83.94,52.29 84.37,22.01 76.78,22.06 89.38,20.03 59.69,35.56 100.68,52.16 1.39,60.35 3.17,60.35 4.94,60.35 6.72,60.35 8.5,60.35 10.28,60.35 12.06,60.35 13.83,60.35 15.61,51.46 15.61,53.24 15.61,55.02 15.61,56.8 15.61,58.58 15.61,60.35 1.39,49.69 3.17,49.69 4.94,49.69 6.72,49.69 8.5,49.69 10.28,49.69 12.06,49.69 13.83,49.69 15.61,49.69 14.73,45.61 16.5,45.61 18.28,45.61 20.06,45.61 21.84,45.61 23.62,45.61 25.39,45.61 27.17,45.61 28.95,45.61 30.73,45.61 32.51,45.61 34.28,45.61 36.06,45.61 37.84,45.61 39.62,45.61 41.04,24.27 41.04,26.05 41.04,29.6 41.04,31.38 41.04,33.16 41.04,34.94 41.04,36.72 41.04,38.49 41.04,40.27 41.04,42.05 41.04,43.83 41.04,45.61 6.34,26.58 6.34,28.36 6.34,30.14 6.34,31.91 6.34,33.69 6.34,35.47 6.34,37.25 6.34,39.03 6.34,40.8 6.34,21.25 6.34,23.02 6.34,24.8 41.04,12.1 41.04,13.6 41.04,15.38 41.04,17.16 41.04,18.94 41.04,20.71 41.04,22.49 37.84,12.1 39.62,12.1 14.73,12.1 16.5,12.1 18.28,12.1 20.06,12.1 21.84,12.1 23.62,12.1 25.39,12.1 27.17,12.1 28.95,12.1 30.73,12.1 32.51,12.1 34.28,12.1 36.06,12.1 11.17,12.1 12.95,12.1 6.37,19.85 7.54,19.09 9.04,19.11 10.13,18.12 116.48,18.81 108.98,18.81 107.28,36.13 105.61,44.59 111.14,39.05 1.27,68.83 6.35,68.83 11.43,68.83 16.51,68.83 21.59,68.83 26.67,68.83 31.75,68.83 36.83,68.83 41.91,68.83 46.99,68.83 52.07,68.83 57.15,68.83 62.23,68.83 67.31,68.83 87.63,68.83 92.71,68.83 71.49,67.75 76.85,67.75 81.98,67.78 72.99,57.14 71.27,60.39 49.28,22.61 49.28,32.51 45.97,14.73 52.07,14.73 58.17,42.42 65.79,42.42 72.64,32.77 64.26,50.55 55.88,50.55 46.99,50.55 28.96,50.55 96.01,64.85 96.01,59.69 103.38,68.83 108.71,68.83 108.71,61.47 103.38,61.47 115.57,63.25 120.65,63.25 125.73,63.25 145.8,59.69 143.08,59.72 143,41.91 143,36.83 143,31.75 127,26.42 126.75,8.64 133.6,5.59 130.05,8.64 123.44,5.59 127,22.1 127,20.32 124.97,39.88 127.51,31.24 127,43.43 132.08,60.96 133.86,62.74 137.67,66.55 132.84,66.55 97.79,68.83 113.03,68.83 118.11,68.83 123.19,68.83 128.27,68.83 143.51,68.83 148.59,68.83 148.84,36.83 148.84,41.91 148.84,46.99 148.84,52.07 148.84,57.15 148.84,62.23 123.23,38.15 123.23,39.93 123.23,41.71 123.23,43.49 123.23,36.38 123.23,27.49 123.23,29.26 123.23,31.04 123.23,32.82 123.23,34.6 123.23,25.71 123.23,23.93 148.84,6.35 148.84,11.43 148.84,16.51 148.84,21.59 148.84,26.67 148.84,31.75 103.12,1.27 108.2,1.27 113.28,1.27 118.36,1.27 123.44,1.27 128.52,1.27 133.6,1.27 138.68,1.27 143.76,1.27 148.84,1.27 57.4,1.27 62.48,1.27 67.56,1.27 72.64,1.27 77.72,1.27 82.8,1.27 87.88,1.27 92.96,1.27 98.04,1.27 47.24,9.91 52.32,5.84 95.63,22.79 100.71,22.79 92.1,39.21 92.1,34.15 55.37,22.61 55.37,32.51 89.89,52.31 87.14,54.42 45.97,22.61 45.97,32.51 51.82,22.61 51.82,32.51 135.38,30.73 1.52,36.7 1.52,41.78 1.52,46.86 1.52,6.22 1.52,11.3 1.52,16.38 1.52,21.46 1.52,26.54 1.52,31.62 1.27,64.77 1.52,1.27 6.6,1.27 21.84,1.27 26.92,1.27 32,1.27 37.08,1.27 42.16,1.27 47.24,1.27 52.32,1.27 11.68,1.27 16.76,1.27 77.62,48.93 98.78,35.73 109.9,32.68 115.01,28.84 107.72,42.46 93.06,12.33 83.03,18.68 63.09,19.09 70.91,28.97 7.33,41.9 9.11,41.9 10.89,41.9 12.54,41.9 13.53,42.81 13.53,44.59 10.13,13.12 10.13,14.9 10.13,16.67 127.51,36.83 124.97,33.78 124.97,28.45 143,26.67 71.27,52.41
  pour Top (rank 2): 0,70 150,70 150,0 0,0
  pour Bottom (rank 2): 0,70 150,70 150,0 0,0
I2C_LED  (via drill 0.51 pad 1.02)
  Top 0.508: v82.11,35.52 R15.2
  Bottom 0.254: U6.7 98.77,41.26 81.3,41.26 81.3,35.52 v82.11,35.52
IO-CTS  (via drill 0.51 pad 1.02)
  Top 0.254: v107.99,28.69 107.99,31.56 112.68,31.56 U4.13
  Bottom 0.406: U3.14 107.45,29.23 v107.99,28.69 108.61,28.07 108.61,22.36 U5.7
IO-DCD  (via drill 0.51 pad 1.02)
  Top 0.254: v105.2,26.02 116.99,26.02 116.99,52.2 111.18,52.2 U4.25
  Bottom 0.406: U3.17 103.94,27.28 v105.2,26.02 106.64,24.58 U5.4
IO-DSR  (via drill 0.51 pad 1.02)
  Top 0.254: v107.05,27.77 116.18,27.77 116.18,44.05 U4.23
  Bottom 0.406: U3.15 106.22,28.58 v107.05,27.77 107.89,26.91 107.89,22.38 U5.6
IO-DTR  (via drill 0.51 pad 1.02)
  Top 0.254: v103.32,24.22 103.35,24.24 117.8,24.24 117.8,53.02 109.18,53.02 U4.29
  Bottom 0.406: 104.69,22.95 U5.1 104.69,22.85 v103.32,24.22 103.3,24.22 102.18,25.33 U3.20
IO-RI  (via drill 0.51 pad 1.02)  (1 unrouted)
  Top 0.254: v104.26,25.13 117.39,25.13 117.39,52.61 110.18,52.61 U4.27
  Bottom 0.406: U5.3 105.97,22.35 105.97,23.43 102.77,26.63 U3.18
IO-RTS  (via drill 0.51 pad 1.02)
  Top 0.254: v106.09,26.86 116.58,26.86 116.58,44.55 U4.24
  Bottom 0.406: U3.16 105.02,27.93 v106.09,26.86 107.29,25.66 U5.5
IO-RX  (via drill 0.51 pad 1.02)
  Top 0.254: U4.16 114.21,40.54 114.21,29.58 v108.96,29.58
  Bottom 0.406: U3.13 108.66,29.88 v108.96,29.58 109.24,29.27 U5.8
IO-TX  (via drill 0.51 pad 1.02)  (1 unrouted)
  Top 0.254: U4.15 113.73,40.04 113.73,30.54 v109.87,30.54
  Bottom 0.406: U3.12 109.89,30.53 U5.9
IR_BOOST  (via drill 0.51 pad 1.02)
  Top 0.254: U1.27 138.12,15.58 139.57,15.58 v139.57,15.38
  Top 0.508: v139.57,24.34 139.57,37.93 134.26,37.93
  Top 0.813: R28.2 129.44,50.32 130.12,49.64
  Bottom 0.254: TP3.P$1 132.21,33.63 132.21,35.43
  Bottom 0.508: v139.57,15.38 v139.57,24.34 139.57,26.4 R4.1
  other vias: 131.32,41.66 131.32,40.39 131.32,39.12
  pour Bottom (isolate 0.61, no thermals): 133.42,42.38 129.48,42.38 129.48,29.93 133.42,29.93
  pour Top (isolate 0.61, no thermals): 129.48,50.3 135.35,50.3 135.35,37.25 129.48,37.25
IR_SIM_CLK  (via drill 0.51 pad 1.02)
  Top 0.203: J1.24 66.03,21.94 v66.03,22.57 | v63.09,28.36 63.09,22.64 v63.14,22.59
  Bottom 0.203: U2.13 67.75,28.36 v63.09,28.36
  Bottom 0.254: v66.03,22.57 66.01,22.59 v63.14,22.59
IR_SIM_EN  (via drill 0.51 pad 1.02)
  Top 0.203: J1.25 68.8,21.44 v68.8,21.65
  Bottom 0.203: v68.8,21.65 60.34,21.65 60.34,32.19 JP4.3
  Bottom 0.254: JP4.3 64.76,32.19 TP9.P$1
IR_SIM_IO  (via drill 0.51 pad 1.02)
  Top 0.203: J1.27 73.42,20.94 v73.42,20.66
  Top 0.254: v61.31,25.67 v61.31,20
  Bottom 0.203: v73.42,20.66 73.42,20.54 63.32,20.54 63.32,20 v61.31,20
  Bottom 0.254: U2.15 66.74,29.6 61.31,29.6 v61.31,25.67
IR_SIM_RST  (via drill 0.51 pad 1.02)
  Top 0.203: J1.26 65.27,21.44 65.27,23.79 v66.03,23.79
  Bottom 0.254: U2.14 67.25,29.17 62.2,29.17 62.2,23.79 v66.03,23.79
IR_SIM_V  (via drill 0.51 pad 1.02)
  Top 0.203: J1.23 73.41,21.94 73.39,21.92 v73.42,21.88 | v64.36,33.41 64.28,33.34 64.28,31.03 59.35,31.03 v59.35,30.29
  Bottom 0.203: v73.42,21.88 73.35,21.96 69.67,21.96 69.67,20.89 59.35,20.89 v59.35,30.29
  Bottom 0.254: U2.2 64.36,33.72 v64.36,33.41
MODE_SW  (via drill 0.51 pad 1.02)
  Top 0.203: v66.19,18.22 65.45,18.22 65.45,20.44 J1.30
  Bottom 0.254: JP1.2 56.18,13.14 56.18,18.22 v66.19,18.22
N$1
  Bottom 0.254: U2.1 65.52,32.6 63.52,32.6 63.52,33.19 62.6,33.19 JP4.2
N$2
  pour Top (isolate 0.254, no thermals): 135.63,16.01 135.63,29.89 128.11,29.89 128.11,22.19 134.05,22.19 134.05,17.03 132.86,17.03 132.86,9.13 135.15,9.13 135.15,16.01
N$3
  Top 0.254: U1.36 139.31,21.75 C2.2
N$4
  Bottom 0.254: JP1.3 56.94,12.13 56.94,13.12 JP2.2
N$5
  Top 0.203: U1.32 139.32,18.68
  Top 0.254: U1.32 143.37,18.68 C1.1
N$6
  Top 0.254: U1.33 140.16,19.18 R1.2
N$7  (via drill 0.51 pad 1.02)
  Top 0.508: v92.12,14.54 v92.13,14.54 LED1.C
  Bottom 0.508: 92.12,14.52 v92.12,14.54 92.14,14.52 92.14,13.65 Q1.3
N$8
  Top 0.305: U1.30 139.65,17.35 C4.1 R2.2
N$9
  Top 0.61: R2.1 143.4,14.71 C3.1
N$10
  Top 0.254: U1.31 145.56,18.18 R7.2
  Top 0.61: R7.2 R5.2
N$11
  Bottom 0.508: JP3.2 S1.2
N$13
  Top 0.508: LED1.A 87.11,17.34 R8.2
N$14
  Bottom 0.254: U3.2 79.3,25.98 C22.2
  Bottom 0.508: JP5.2 79.32,23.61 C22.2
N$15  (1 unrouted)
  Bottom 0.203: U7.11 82.71,60.5 82.97,60.77 84.02,60.77 86.53,63.28
  Bottom 0.508: J3.2 86.53,63.28
N$16
  Top 0.508: LED2.A R15.1
N$17
  Top 0.254: U4.6 108.18,34.14 FB1.1
  Top 0.508: C24.1 108.1,34.26 FB1.1
N$18
  Top 0.254: C21.1 100.38,39.19 100.38,41.47 104.18,41.47 U4.43
N$19
  Top 0.254: U4.1 105.68,35.97 103.91,35.97 C25.1
  Top 0.508: C25.1 Y1.P$2
N$20
  Top 0.254: U4.2 106.18,35.4 104.52,35.4 104.52,34.26 C26.1
  Top 0.508: Y1.P$1 C26.1
N$21
  Top 0.508: R13.1 LED4.A
N$22
  Top 0.508: R14.1 LED5.A
N$26
  Top 0.813: PMIC2.4 R27.2 | R27.2 141.21,48.52 | R29.1 R27.2
N$27
  Top 0.813: PMIC2.2 R26.2
N$28
  Bottom 0.508: LED8.4 40.16,65.19 25.57,65.19 25.57,62.42 LED7.1
N$29
  Bottom 0.508: 49.16,61.86 LED9.4 49.16,59 35.59,59 LED8.1
N$30
  Top 0.813: PMIC1.4 R23.2 R25.1
N$31
  Top 0.813: R22.2 141.18,53.81 PMIC1.2
N$32
  Bottom 0.508: LED9.1 44.59,65.19 62.84,65.19 LED10.4
N$33  (via drill 0.51 pad 1.02)
  Top 0.254: U1.25 137.12,14.79 v137.71,14.79
  Bottom 0.508: v137.71,14.79 R3.2
N$34
  Top 0.508: LED6.A R24.1
N$35
  Top 0.813: LED14.A 57.23,64.58 R34.1
N$36
  Top 0.508: R16.1 LED3.A
N$37
  Top 0.813: LED12.A R32.2
N$38  (via drill 0.51 pad 1.02)
  Top 0.508: Q2.3 75.2,49.34 v75.18,49.36 | v51.63,60.11 LED12.C
  Bottom 0.508: v75.18,49.36 75.18,53.38 51.61,53.38 51.61,60.11 v51.63,60.11
N$39
  Top 0.508: R35.1 LED15.A
N$40
  Top 0.813: R28.1 LED11.A
N$41
  Top 0.508: LED13.A 90.03,21.73 R33.2
N$42  (via drill 0.51 pad 1.02)
  Top 0.508: v92.96,20.43 92.96,21.7 LED13.C
  Bottom 0.508: Q3.3 v92.97,20.43 v92.96,20.43
N$71
  Bottom 0.254: U6.9 97.2,50.65 97.2,48.22 95.05,48.22 93.4,49.87 R17.2
N$72
  Bottom 0.203: U6.23 103.58,52.25 R18.2
N$75
  pour Top (isolate 0.254, no thermals): 3.8,55.96 10.43,55.96 10.43,54.13 3.8,54.13
PIXELS  (via drill 0.51 pad 1.02)
  Top 0.254: U4.28 109.68,44.16 v109.42,43.9
  Top 0.508: v99.71,42.05 v97.81,42.05 | v77.78,47.6 77.76,47.58 44.92,47.58 LED7.4
  Bottom 0.254: v99.71,42.05 106.17,42.05 106.17,43.9 v109.42,43.9
  Bottom 0.508: 97.83,42.05 v97.81,42.05 91.48,42.05 91.48,47.59 91.47,47.6 v77.78,47.6
PWR_EN  (via drill 0.51 pad 1.02)  (1 unrouted)
  Top 0.203: J1.32 66.21,19.94 v66.21,19.44
  Top 0.508: v101.29,20.43 118.74,20.43 118.74,53.96 113.94,53.96 113.94,57.39 v112.52,57.39
  Bottom 0.203: v66.21,19.44 68.41,19.44 68.84,19.01 69.47,19.01 69.96,19.49 81.73,19.49
  Bottom 0.254: 81.73,19.49 88.64,19.49 88.64,18.39 | U6.20 100.76,54.24 102.03,54.24 102.03,56.96 112.52,56.96 v112.52,57.39 115.05,57.39 TP5.P$1
  Bottom 0.508: Q3.1 | Q3.1 88.64,18.39 R37.1 | Q3.1 95.85,18.39 95.85,20.43 v101.29,20.43 101.36,20.43
PWR_SW
  Bottom 0.254: R31.1 116.22,59.34 116.22,56.55 102.43,56.55 102.43,53.84 101.17,53.84 U6.21
  Bottom 0.508: R31.1 S3.2
RF_EN  (via drill 0.51 pad 1.02)
  Top 0.203: J1.28 67.99,20.94 v69.16,19.77
  Top 0.508: v81.4,20.48 85.77,20.48 S1.1
  Bottom 0.203: v69.16,19.77 69.23,19.85 81.4,19.85 v81.4,20.48
  Bottom 0.254: v81.4,20.48 87.36,20.48 TP6.P$1
  Bottom 0.508: S1.1 87.32,12.76 Q1.1 87.75,12.7 87.75,11.18 R9.1
RI  (via drill 0.51 pad 1.02)
  Top 0.203: J1.20 68.88,22.94 68.88,23.99 v69.64,23.99
  Bottom 0.203: v69.64,23.99 69.64,23.71 76.01,23.71 76.01,26.63 U3.3
RS232-CTS
  Bottom 0.254: U5.14 108.59,14.67 112.34,14.67 X3.7
RS232-DCD
  Bottom 0.254: X3.4 104.72,14.26 106.64,14.26 U5.17
RS232-DSR
  Bottom 0.254: U5.15 107.94,14.26 109.8,14.26 X3.6
RS232-DTR
  Bottom 0.254: X3.2 99.64,15.07 104.69,15.07 U5.20
RS232-RI
  Bottom 0.254: U5.18 105.99,14.67 102.2,14.67 102.2,12.51 X3.3
RS232-RTS
  Bottom 0.254: U5.16 107.29,12.48 X3.5
RS232-RX
  Bottom 0.254: U5.13 109.24,15.07 114.88,15.07 X3.8
RS232-TX
  Bottom 0.254: U5.12 109.89,15.48 117.42,15.48 X3.9
RTS  (via drill 0.51 pad 1.02)
  Top 0.203: J1.21 72.74,22.44 72.74,25.01 v73.42,25.01
  Bottom 0.203: v73.42,25.01 75.18,25.01 75.18,27.93 U3.5
RX  (via drill 0.51 pad 1.02)
  Top 0.203: J1.15 71.67,23.94 71.67,28.69 v73.42,28.69
  Bottom 0.203: v73.42,28.69 73.42,29.88 U3.8
RX_LED
  Top 0.254: U4.48 103.46,39.05 102.78,38.36 98.77,38.36 94.27,42.86 LED5.C
SCL  (via drill 0.35)
  Top 0.254: U4.32 107.68,50.22 v106.19,51.7
  Bottom 0.203: U6.25 106.19,51.45 v106.19,51.7
  Bottom 0.254: v106.19,51.7 106.75,51.15 109.75,51.15 TP22.P$1
  Bottom 0.508: R21.2 v106.19,51.7
SDA  (via drill 0.35)
  Top 0.254: U4.31 108.18,51.55 v107.97,51.75
  Bottom 0.254: U6.24 105.15,51.85 105.15,53.45 107.97,53.45 107.97,52.63 | R20.2 109.49,52.63 TP21.P$1
  Bottom 0.508: R20.2 107.97,52.63 v107.97,51.75
SIM_CLK  (via drill 0.51 pad 1.02)
  Top 0.254: v53.05,36.69 53.08,36.72
  Top 0.508: 53.08,36.72 69.69,36.72 v69.69,33.72
  Bottom 0.254: v69.69,33.72 U2.11
  Bottom 0.508: J2.C3 53.03,36.69 v53.05,36.69
SIM_IO
  Bottom 0.254: 67.78,39.41 67.78,35.45 U2.8
  Bottom 0.508: J2.C7 53.03,39.97 67.78,39.97 67.78,39.41
SIM_RST  (via drill 0.51 pad 1.02)
  Top 0.254: v50.49,38.01 50.51,37.98
  Top 0.508: 50.51,37.98 70.76,37.98 v70.76,34.96
  Bottom 0.254: v70.76,34.96 70.76,34.72 U2.9
  Bottom 0.508: J2.C2 v50.49,38.01
SIM_VCC
  Bottom 0.254: U2.7 67.25,39.28 66.15,39.28
  Bottom 0.508: C15.2 47.95,12.91 J2.C1 47.98,17.09 47.98,39.28 66.15,39.28
SWCLK  (via drill 0.51 pad 1.02)
  Top 0.254: U4.45 106.95,40.55 v106.95,39.08
  Top 0.508: J4.4 95.62,35.19 v95.6,35.19
  Bottom 0.254: v106.95,39.08 106.95,40.45 95.6,40.45 v95.6,35.19
SWDIO  (via drill 0.51 pad 1.02)
  Top 0.254: U4.46 105.63,40.05 v105.63,39.08
  Top 0.508: J4.2 94.35,32.55 v94.33,32.55
  Bottom 0.254: v105.63,39.08 105.63,39.99 97.53,39.99 97.53,32.55 v94.33,32.55
SYS-RX  (via drill 0.51 pad 1.02)
  Top 0.254: U4.38 97.49,44.05 v96.28,45.25
  Bottom 0.203: U7.3 81.91,50.58
  Bottom 0.254: 81.91,50.58 90.95,50.58 v96.28,45.25
SYS-TX  (via drill 0.51 pad 1.02)
  Top 0.254: U4.37 98.87,44.55 v97.17,46.24
  Bottom 0.203: U7.2 82.31,51.02
  Bottom 0.254: 82.31,51.02 91.2,51.02 95.14,47.08 96.34,47.08 v97.17,46.24
SYS_LED  (via drill 0.51 pad 1.02)
  Top 0.254: U4.26 110.68,42.94 v110.69,42.94
  Top 0.508: v82.11,39.18 R16.2
  Bottom 0.254: v110.69,42.94 108.6,40.85 82.11,40.85 v82.11,39.18
TES-EN
  Top 0.61: U8.1 77.02,55.69 J7.3
  Bottom 1.27: J7.3 77.02,64.05 CR2.1
TES-GPS-FLAG
  Bottom 0.203: 79.29,61.76 J7.4 79.02,60.77 80.84,60.77 81.11,60.5 U7.7
TES-RX
  Bottom 0.203: U7.9 81.91,61.05 81.2,61.76 J7.5
TES-TX
  Bottom 0.203: U7.10 82.31,61.05 J7.6
TX  (via drill 0.51 pad 1.02)
  Top 0.203: J1.16 68.17,23.94 68.17,28.69 v69.67,28.69
  Bottom 0.203: v69.67,28.69 69.67,30.53 U3.9
TX_ACTIVE  (via drill 0.51 pad 1.02)  (1 unrouted)
  Top 0.203: J1.31 72.31,19.94 72.31,17.46 v73.42,17.46
  Top 0.254: v92.27,54.44 89.43,57.29 v81.1,57.29
  Top 0.508: v78.78,17.46 v78.78,49.34
  Bottom 0.254: v73.42,17.46 v78.78,17.46 | v81.1,57.29 81.1,58.53 U7.5 | v92.27,54.44 97.74,54.44 U6.15 | TP10.P$1 78.85,49.28 v78.78,49.34
  Bottom 0.508: v81.1,57.29 81.1,51.65 v78.78,49.34
TX_LED
  Top 0.254: U4.39 104.29,43.55 104.3,43.55 96.87,43.55 93.75,46.67 LED4.C
USB_D+  (via drill 0.51 pad 1.02)  (1 unrouted)
  Top 0.254: U4.34 106.68,48.76 104.92,50.51 104.92,57.49 106.04,57.49 v106.04,58.66
  Bottom 0.254: v106.04,58.66 106.04,60.72
USB_D-  (via drill 0.51 pad 1.02)
  Top 0.254: U4.33 107.18,49.5 105.56,51.12 105.56,56.93 106.95,56.93 106.95,59.6 v105.25,59.6
  Bottom 0.254: v105.25,59.6 105.26,59.6 J5.D-
V_BATT  (via drill 0.51 pad 1.02)  (1 unrouted)
  Top 0.508: 63.06,16.5 v63.05,16.5 57.52,16.5 v57.52,20.05 | C37.1 121.38,19
  Top 0.813: 94.43,6.01 94.43,23.46 86.76,23.46 | 86.76,23.46 R24.2 | 86.76,23.46 R33.1 86.75,19.02 R8.1
  Top 1.016: J1.38 | J1.40 67.38,16.5 v67.41,16.5
  Top 1.524: PMIC1.TAB 130.2,54.95 130.2,52.27 121.38,52.27 121.38,20.04 121.38,19 121.38,6.01 94.43,6.01 v63.04,6.01 v63.04,7.94
  Bottom 0.254: JP4.1 | U2.5 65.42,36.27 C16.2 63.62,34.22 U2.3 | TP2.P$1 63.2,5.84 v63.04,6.01
  Bottom 0.508: 57.52,20.1 57.52,34.23 JP4.1 62.6,36.27 C16.2
  Bottom 1.27: v67.41,16.5 v63.05,16.5 C6.2 | v63.05,7.94 v63.04,7.94
  Bottom 1.524: v63.04,6.01 v63.04,7.94 63.04,13.41 C6.2
  pour Top (no thermals): 66.9,19.06 67.89,19.06 67.89,17.79 66.9,17.79
VBAT
  Top 0.508: 136.88,59.38 R35.2
  Bottom 1.27: C40.1 136.88,58.15 X1.P$2
  Bottom 1.524: CR1.1 140.38,61.03 X1.P$2
  pour Top (isolate 0.61, no thermals): 139.95,49.34 139.95,50.96 137.53,50.96 137.53,61.94 136.11,61.94 136.11,49.34
VCC  (via drill 0.51 pad 1.02)
  Top 0.254: R7.1 145.89,16.48 U1.28
  Top 0.508: 128.92,11.37 129.03,11.37 | v67.13,14.95 67.36,14.95
  Top 0.61: R7.1 145.81,16.16 v145.81,12.2
  Top 0.813: 71.01,17.89 68.06,14.95 67.36,14.95 v66.01,14.95
  Bottom 0.254: TP4.P$1 68.83,7.96 68.91,8.04
  Bottom 0.508: C14.1 arc-90 91.77,8.86 91.77,8.04 | C5.2 66.01,13.42 v66.01,14.95
  Bottom 0.61: 145.81,12.13 v145.81,12.2 127.47,12.2 126.21,13.46
  Bottom 1.27: v66.01,14.95 66.01,8.04 68.91,8.04 91.77,8.04 119.88,8.04 119.88,13.46 126.21,13.46 v126.24,13.46
  other vias: 126.24,11.68 126.24,15.24
  pour Bottom (isolate 0.61, no thermals): 122.45,16.52 132.48,16.52 132.48,10.55 122.45,10.55
  pour Top (isolate 0.305, no thermals): 123.72,16.52 132.48,16.52 132.48,9.79 123.72,9.79
  pour Top (no thermals): 71.37,18.58 70.38,18.58 70.38,17.49 71.37,17.49

## Text on the board
Bottom: AVERY BROCK | 2018 | SCUBEE
tPlace: GND
bPlace: SAMD21 PRG | TES BUS | BATT PWR | TP7 | TP13 | TP5 | TP21 | TP16 | GND | GND | +5VDC | +8VDC | ENABLE | TP17 | GPS FLAG | TP22 | UART RX | TP19 | UART TX | TP10 | TP18 | IRIDIUM SIM | TP15 | TP14 | TP11 | 5V | TP1 | SIM EN | TP3 | TP20 | IR | TP9 | TP6 | IR | 3.3 | V SIG | TP12 | V SIG | TP8 | OP MODE | 0 | IR | V SIG | IR | 3.3 | 3.3 | 1 | GND | DTR | RI | DCD | RTS | DSR | CTS | RX | TX | GND | TP2 | TP4
tNames: +5V | 8V GOOD | Bus Voltage | 5V GOOD | TES BUS | +3.3V | ON | DISABLED | STATUS | TES BUS | IRIDIUM ENABLE | DO NOT USE WITHOUT ANTENNA | USB TX | BOOST EN | USB RX | uC GOOD | I2C GOOD | RESET | CORTEX / DBG | IR 5V GOOD | IR ENABLED | FULL RF PWR | ON | FULL RF POWER | IRIDIUM RS-232 3.3V TTL
bNames: Engineering / Capstone 2019 | Team SCUBEE | Iridium 9523 Carrier Board | Designed by Avery Brock | SAMD21 Arduino M0 Compatible / 5VDC ~1A 8VDC ~5A / TES Bus: / 3.3 or 5V TTL UART / 3.3-5V Master Enable / RS-232 Header: 3.3V TTL RS-232 / SX1509 I2C Bus Expander / LT3959 30V 1A DC-DC | WARNING: HIGH-POWER RF TRANSMITTER / DO NOT OPERATE IN PROXIMTY OF GPS DEVICES.
tStop: Engineering / Capstone 2019 | Team SCUBEE